# EAGLE board Circuito - Sensor de Temperatura com LEDs (EAGLE 9.7.0)

Size 203.2 x 111.63 mm. Coordinates in mm from the lower left corner, seen from the top.
Outline: 0,0 203.2,0 203.2,111.63 0,111.63 0,0
Copper layers (1*16): Top 0.035mm / dielectric 1.5mm / Bottom 0.035mm
Design rules "default": minimum track width 6mil, minimum drill 0.35mm, track to track 6mil, track to pad 6mil, pad to pad 6mil, via to via 6mil, smd to smd 6mil, copper to edge 40mil, drill to drill 6mil, minimum pad ring 10mil, minimum via ring 8mil, stop-mask expansion 4mil, vias tented up to drill 0mil, thermal gap 10mil

## Footprints (pad centres in the part's own frame; a part is rotated, then mirrored left to right if it is on the bottom)
LEDRD254W60D565H860B_B = drill 0.981 pad 1.581: 1 -1.27,0; 2 1.27,0
LEDRD254W60D565H860B_G = drill 0.981 pad 1.581: 1 -1.27,0; 2 1.27,0
LEDRD254W60D565H860B = drill 0.981 pad 1.581: 1 -1.27,0; 2 1.27,0
DG01D = drill 1.118 pad 3.15 octagon: + 2.54,0; - -2.54,0
PIEZO = drill 1 pad 1.6: 1 -3.5,0; 2 3.5,0
TO220V = drill 1.016 long: 1 -2.54,-2.54; 2 0,-2.54; 3 2.54,-2.54
RESAD1016W63L850D250B = drill 0.83 pad 1.43: 1 -5.08,0; 2 5.08,0
ARDUINO-UNO-R3-SHIELD = drill 1.016 pad 1.88: 3.3V 24.13,-2.54; 5V 24.13,0; A0 24.13,12.7; A1 24.13,15.24; A2 24.13,17.78; A3 24.13,20.32; A4 24.13,22.86; A5 24.13,25.4; AREF -24.13,-13.97; D2 -24.13,20.32; D3 -24.13,17.78; D4 -24.13,15.24; D5 -24.13,12.7; D6 -24.13,10.16; D7 -24.13,7.62; D8 -24.13,3.81; D9 -24.13,1.27; D10 -24.13,-1.27; D11 -24.13,-3.81; D12 -24.13,-6.35; D13 -24.13,-8.89; GND@0 24.13,2.54; GND@1 24.13,5.08; GND@2 -24.13,-11.43; IOREF 24.13,-7.62; NC 24.13,-10.16; RES 24.13,-5.08; RX -24.13,25.4; SCL -24.13,-19.05; SDA -24.13,-16.51; TX -24.13,22.86; VIN 24.13,7.62
TO92 = drill 0.813 octagon: 1 -1.27,0; 2 0,1.905; 3 1.27,0

## Placement (x,y rotation side)
DLEDAZUL  BLUE  [LEDRD254W60D565H860B_B]  139.49,23.34 90 top
DLEDVERDE  GREEN  [LEDRD254W60D565H860B_G]  139.49,30.96 90 top
DLEDVERMELHO  RED  [LEDRD254W60D565H860B]  139.49,38.58 90 top
MMOTORDC  MOTOR_DG01D  [DG01D]  190.5,37.34 180 top
PIEZOBUZINA  PIEZO  [PIEZO]  139.49,56.36 270 top
Q1  TIP120_TO220-V  [TO220V]  139.49,77.95 270 top
RRESISTENCIAMOTOR  300  [RESAD1016W63L850D250B]  124.25,80.49 0 top
RRESISTORLEDAMARELO  300  [RESAD1016W63L850D250B]  124.25,29.69 0 top
RRESISTORLEDAZUL  300  [RESAD1016W63L850D250B]  124.25,22.07 0 top
RRESISTORLEDVERMELHO  300  [RESAD1016W63L850D250B]  124.25,37.31 0 top
U1  ARDUINO-UNO-R3-SHIELD  [ARDUINO-UNO-R3-SHIELD]  47.88,29.84 270 top
USENSORTEMPERATURA  TMP36GT9Z_TO92  [TO92]  139.49,9.37 270 top

## Library data of the parts
DLEDAZUL = Tinkercad; CATEGORY: Opto-Electronic; SUB-CATEGORY: LED; VALUE: LED_BLUE
DLEDVERDE = Tinkercad; CATEGORY: Opto-Electronic; SUB-CATEGORY: LED; VALUE: LED_GREEN
DLEDVERMELHO = Tinkercad; CATEGORY: Opto-Electronic; SUB-CATEGORY: LED; VALUE: LED_RED
MMOTORDC PIEZOBUZINA Q1 RRESISTENCIAMOTOR RRESISTORLEDAMARELO RRESISTORLEDAZUL RRESISTORLEDVERMELHO U1 USENSORTEMPERATURA = Tinkercad

## Nets
DLEDAZUL_A: DLEDAZUL.1 RRESISTORLEDAZUL.2
DLEDVERDE_A: DLEDVERDE.1 RRESISTORLEDAMARELO.2
DLEDVERMELHO_A: DLEDVERMELHO.1 RRESISTORLEDVERMELHO.2
MMOTORDC_-: MMOTORDC.- Q1.2
Q1_B: Q1.1 RRESISTENCIAMOTOR.2
U1_5V: MMOTORDC.+ U1.5V USENSORTEMPERATURA.3
U1_A0: U1.A0 USENSORTEMPERATURA.2
U1_D2: RRESISTORLEDVERMELHO.1 U1.D2
U1_D3: RRESISTORLEDAMARELO.1 U1.D3
U1_D4: RRESISTORLEDAZUL.1 U1.D4
U1_D12: PIEZOBUZINA.1 U1.D12
U1_D13: RRESISTENCIAMOTOR.1 U1.D13
U1_GND: DLEDAZUL.2 DLEDVERDE.2 DLEDVERMELHO.2 PIEZOBUZINA.2 Q1.3 U1.GND@0 U1.GND@1 U1.GND@2 USENSORTEMPERATURA.1

## Tracks (layer width: path | path; a pad name or v marks a point on that pad's centre or on a via)
DLEDAZUL_A  (1 unrouted)
DLEDVERDE_A  (1 unrouted)
DLEDVERMELHO_A  (1 unrouted)
MMOTORDC_-  (1 unrouted)
Q1_B  (1 unrouted)
U1_5V  (2 unrouted)
U1_A0  (1 unrouted)
U1_D2  (1 unrouted)
U1_D3  (1 unrouted)
U1_D4  (1 unrouted)
U1_D12  (1 unrouted)
U1_D13  (1 unrouted)
U1_GND  (8 unrouted)